# Altium PCB PCB1.PcbDoc (part 2 of 2)
Units mm, origin at the board's own origin, x right, y up, seen from the top; angles counter-clockwise.
Board outline 123 x 45 mm, 2 copper layers (Top Layer, Bottom Layer); 147 components, 132 nets, 546 pads, 235 vias.
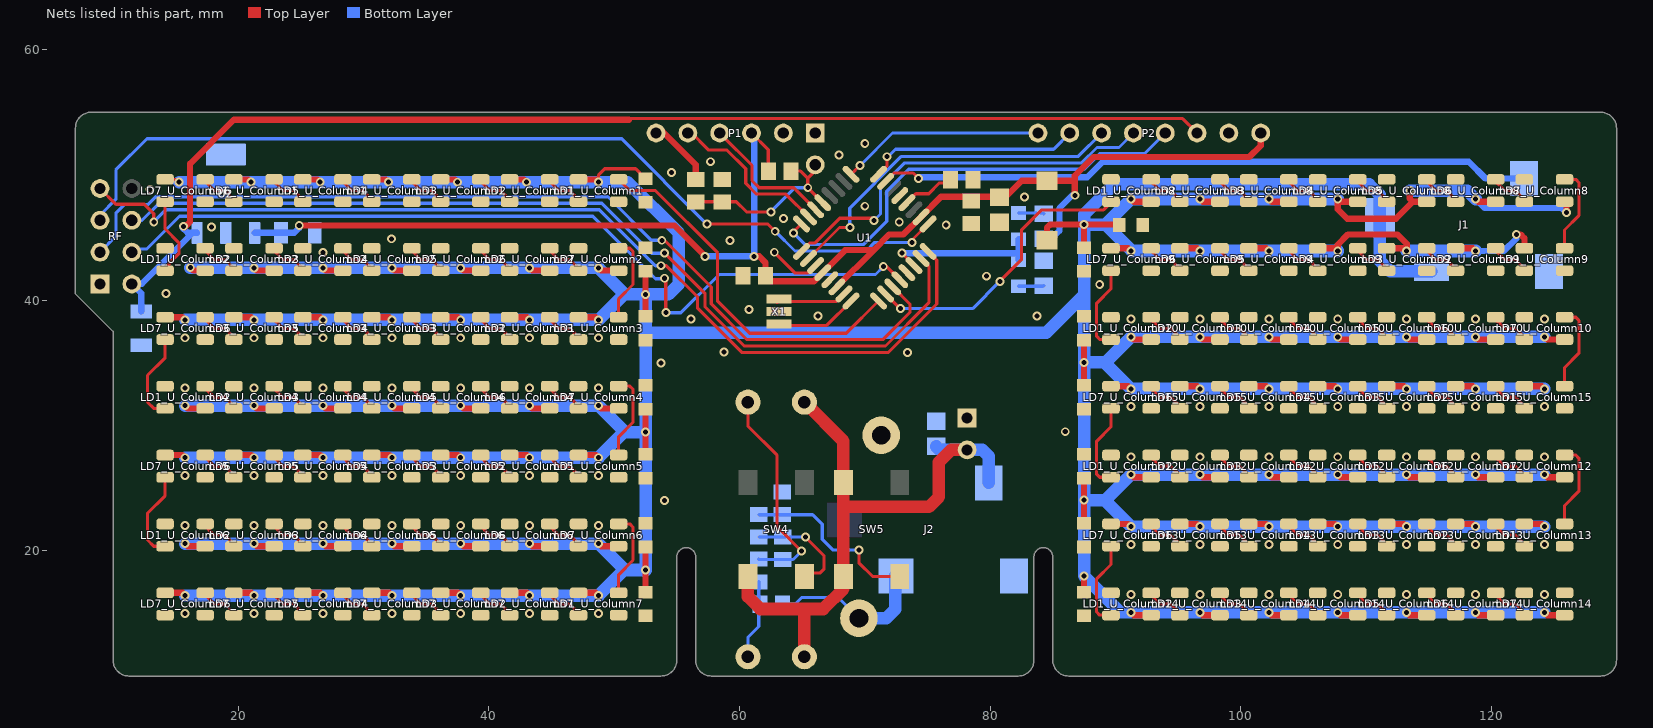
[diagram p2: the nets of this part, all layers, seen from the top]

## Via types
v1: diameter 0.711, hole 0.4, Top Layer to Bottom Layer, tented both sides, 231 vias
v2: diameter 1.702, hole 1.702, Top Layer to Bottom Layer, 4 vias

## Nets (pads, with @x,y where several pads share a name; then routed paths per layer and width w, separated by ;. In a path a pad name is that pad's centre, name@x,y a point inside that pad or via, vN(x,y) a via of type N, cw(c..) or ccw(c..) an arc to the next point about the centre after c; other vN are vias at no path point)
5V_LEDS: C7.2 C8.2 C9.2 C10.2 C11.2 C12.2 C13.2 C14.2 C15.2 C16.2 C17.2 C18.2 C19.2 C20.2 D4.1 J1.2 J1.4 LD1_U_Column1.1 LD1_U_Column2.1 LD1_U_Column3.1 LD1_U_Column4.1 LD1_U_Column5.1 LD1_U_Column6.1 LD1_U_Column7.1 LD1_U_Column8.1 LD1_U_Column9.1 LD1_U_Column10.1 LD1_U_Column12.1 LD1_U_Column13.1 LD1_U_Column14.1 LD1_U_Column15.1 LD2_U_Column1.1 LD2_U_Column2.1 LD2_U_Column3.1 LD2_U_Column4.1 LD2_U_Column5.1 LD2_U_Column6.1 LD2_U_Column7.1 LD2_U_Column8.1 LD2_U_Column9.1 LD2_U_Column10.1 LD2_U_Column12.1 LD2_U_Column13.1 LD2_U_Column14.1 LD2_U_Column15.1 LD3_U_Column1.1 LD3_U_Column2.1 LD3_U_Column3.1 LD3_U_Column4.1 LD3_U_Column5.1 LD3_U_Column6.1 LD3_U_Column7.1 LD3_U_Column8.1 LD3_U_Column9.1 LD3_U_Column10.1 LD3_U_Column12.1 LD3_U_Column13.1 LD3_U_Column14.1 LD3_U_Column15.1 LD4_U_Column1.1 LD4_U_Column2.1 LD4_U_Column3.1 LD4_U_Column4.1 LD4_U_Column5.1 LD4_U_Column6.1 LD4_U_Column7.1 LD4_U_Column8.1 LD4_U_Column9.1 LD4_U_Column10.1 LD4_U_Column12.1 LD4_U_Column13.1 LD4_U_Column14.1 LD4_U_Column15.1 LD5_U_Column1.1 LD5_U_Column2.1 LD5_U_Column3.1 LD5_U_Column4.1 LD5_U_Column5.1 LD5_U_Column6.1 LD5_U_Column7.1 LD5_U_Column8.1 LD5_U_Column9.1 LD5_U_Column10.1 LD5_U_Column12.1 LD5_U_Column13.1 LD5_U_Column14.1 LD5_U_Column15.1 LD6_U_Column1.1 LD6_U_Column2.1 LD6_U_Column3.1 LD6_U_Column4.1 LD6_U_Column5.1 LD6_U_Column6.1 LD6_U_Column7.1 LD6_U_Column8.1 LD6_U_Column9.1 LD6_U_Column10.1 LD6_U_Column12.1 LD6_U_Column13.1 LD6_U_Column14.1 LD6_U_Column15.1 LD7_U_Column1.1 LD7_U_Column2.1 LD7_U_Column3.1 LD7_U_Column4.1 LD7_U_Column5.1 LD7_U_Column6.1 LD7_U_Column7.1 LD7_U_Column8.1 LD7_U_Column9.1 LD7_U_Column10.1 LD7_U_Column12.1 LD7_U_Column13.1 LD7_U_Column14.1 LD7_U_Column15.1 | length 850.5
  Top Layer w0.254: LD7_U_Column1.1@14.15,49.64 15.11,49.64 15.276,49.474 v1(15.276,49.427) ; v1(48.75,49.424) 48.75,49.998 49.242,50.49 51.71,50.49 C7.2@52.5,49.7
  Top Layer w0.5: LD7_U_Column7.1@14.15,16.64 15.534,16.64 v1(15.75,16.424) ; LD7_U_Column5.1@14.15,27.64 15.534,27.64 v1(15.75,27.424) ; LD7_U_Column3.1@14.15,38.64 15.534,38.64 v1(15.75,38.424) ; v1(15.75,20.576) 15.966,20.36 LD1_U_Column6.1@17.35,20.36 ; v1(15.75,31.576) 15.966,31.36 LD1_U_Column4.1@17.35,31.36 ; v1(16.161,42.602) 16.161,42.621 16.422,42.36 LD1_U_Column2.1@17.35,42.36 ; LD6_U_Column7.1@19.65,16.64 21.034,16.64 v1(21.25,16.424) ; LD6_U_Column5.1@19.65,27.64 21.034,27.64 v1(21.25,27.424) ; LD6_U_Column3.1@19.65,38.64 21.034,38.64 v1(21.25,38.424) ; LD6_U_Column1.1@19.65,49.64 20.796,49.64 v1(21.012,49.424) ; v1(21.25,20.576) 21.466,20.36 LD2_U_Column6.1@22.85,20.36 ; v1(21.25,31.576) 21.466,31.36 LD2_U_Column4.1@22.85,31.36 ; v1(21.25,42.576) 21.466,42.36 LD2_U_Column2.1@22.85,42.36 ; LD5_U_Column7.1@25.15,16.64 26.534,16.64 v1(26.75,16.424) ; LD5_U_Column5.1@25.15,27.64 26.534,27.64 v1(26.75,27.424) ; LD5_U_Column3.1@25.15,38.64 26.534,38.64 v1(26.75,38.424) ; LD5_U_Column1.1@25.15,49.64 26.315,49.64 v1(26.534,49.421) ; v1(26.75,20.576) 26.966,20.36 LD3_U_Column6.1@28.35,20.36 ; v1(26.75,31.576) 26.966,31.36 LD3_U_Column4.1@28.35,31.36 ; v1(26.75,42.576) 26.966,42.36 LD3_U_Column2.1@28.35,42.36 ; LD4_U_Column7.1@30.65,16.64 32.034,16.64 v1(32.25,16.424) ; LD4_U_Column5.1@30.65,27.64 32.034,27.64 v1(32.25,27.424) ; LD4_U_Column3.1@30.65,38.64 32.034,38.64 v1(32.25,38.424) ; LD4_U_Column1.1@30.65,49.64 31.781,49.64 v1(32,49.421) ; v1(32.25,20.576) 32.466,20.36 LD4_U_Column6.1@33.85,20.36 ; v1(32.25,31.576) 32.466,31.36 LD4_U_Column4.1@33.85,31.36 ; v1(32.25,42.576) 32.466,42.36 LD4_U_Column2.1@33.85,42.36 ; LD3_U_Column7.1@36.15,16.64 37.534,16.64 v1(37.75,16.424) ; LD3_U_Column5.1@36.15,27.64 37.534,27.64 v1(37.75,27.424) ; LD3_U_Column3.1@36.15,38.64 37.534,38.64 v1(37.75,38.424) ; LD3_U_Column1.1@36.15,49.64 37.274,49.64 v1(37.5,49.414) ; v1(37.75,20.576) 37.966,20.36 LD5_U_Column6.1@39.35,20.36 ; v1(37.75,31.576) 37.966,31.36 LD5_U_Column4.1@39.35,31.36 ; v1(37.75,42.576) 37.966,42.36 LD5_U_Column2.1@39.35,42.36 ; LD2_U_Column7.1@41.65,16.64 43.034,16.64 v1(43.25,16.424) ; LD2_U_Column5.1@41.65,27.64 43.034,27.64 v1(43.25,27.424) ; LD2_U_Column3.1@41.65,38.64 43.034,38.64 v1(43.25,38.424) ; LD2_U_Column1.1@41.65,49.64 42.774,49.64 v1(43,49.414) ; v1(43.25,20.576) 43.466,20.36 LD6_U_Column6.1@44.85,20.36 ; v1(43.25,31.576) 43.466,31.36 LD6_U_Column4.1@44.85,31.36 ; v1(43.25,42.576) 43.466,42.36 LD6_U_Column2.1@44.85,42.36 ; LD1_U_Column7.1@47.15,16.64 48.534,16.64 v1(48.75,16.424) ; LD1_U_Column5.1@47.15,27.64 48.534,27.64 v1(48.75,27.424) ; LD1_U_Column3.1@47.15,38.64 48.534,38.64 v1(48.75,38.424) ; LD1_U_Column1.1@47.15,49.64 48.534,49.64 v1(48.75,49.424) ; v1(48.75,20.576) 48.966,20.36 LD7_U_Column6.1@50.35,20.36 ; v1(48.75,31.576) 48.966,31.36 LD7_U_Column4.1@50.35,31.36 ; v1(48.75,42.576) 48.966,42.36 LD7_U_Column2.1@50.35,42.36 ; C13.2@52.5,16.7 v1(52.5,18.463) C12.2@52.5,20.3 ; C11.2@52.5,27.7 v1(52.5,29.463) C10.2@52.5,31.3 ; C9.2@52.5,38.7 v1(52.5,40.463) C8.2@52.5,42.3 ; D4.1@84.54,44.775 84.54,45.79 84.787,46.037 v1(87.5,46.037) ; C20.2@87.5,16.7 v1(87.5,18) ; C19.2@87.5,22.2 v1(87.5,24.037) C18.2@87.5,25.8 ; C17.2@87.5,33.2 v1(87.5,35.037) C16.2@87.5,36.8 ; C15.2@87.5,44.2 v1(87.5,46.037) ; LD7_U_Column13.1@89.65,22.14 91.034,22.14 v1(91.25,21.924) ; LD7_U_Column15.1@89.65,33.14 91.034,33.14 v1(91.25,32.924) ; LD7_U_Column9.1@89.65,44.14 91.034,44.14 v1(91.25,43.924) ; C14.2@90.3,46 90.263,46.037 v1(87.5,46.037) ; v1(91.25,15.076) 91.466,14.86 LD1_U_Column14.1@92.85,14.86 ; v1(91.25,26.076) 91.466,25.86 LD1_U_Column12.1@92.85,25.86 ; v1(91.25,37.076) 91.466,36.86 LD1_U_Column10.1@92.85,36.86 ; v1(91.25,48.076) 91.466,47.86 LD1_U_Column8.1@92.85,47.86 ; LD6_U_Column13.1@95.15,22.14 96.534,22.14 v1(96.75,21.924) ; LD6_U_Column15.1@95.15,33.14 96.534,33.14 v1(96.75,32.924) ; LD6_U_Column9.1@95.15,44.14 96.534,44.14 v1(96.75,43.924) ; v1(96.75,15.076) 96.966,14.86 LD2_U_Column14.1@98.35,14.86 ; v1(96.75,26.076) 96.966,25.86 LD2_U_Column12.1@98.35,25.86 ; v1(96.75,37.076) 96.966,36.86 LD2_U_Column10.1@98.35,36.86 ; v1(96.75,48.076) 96.966,47.86 LD2_U_Column8.1@98.35,47.86 ; LD5_U_Column13.1@100.65,22.14 102.034,22.14 v1(102.25,21.924) ; LD5_U_Column15.1@100.65,33.14 102.034,33.14 v1(102.25,32.924) ; LD5_U_Column9.1@100.65,44.14 102.034,44.14 v1(102.25,43.924) ; v1(102.25,15.076) 102.466,14.86 LD3_U_Column14.1@103.85,14.86 ; v1(102.25,26.076) 102.466,25.86 LD3_U_Column12.1@103.85,25.86 ; v1(102.25,37.076) 102.466,36.86 LD3_U_Column10.1@103.85,36.86 ; v1(102.25,48.076) 102.466,47.86 LD3_U_Column8.1@103.85,47.86 ; LD4_U_Column13.1@106.15,22.14 107.534,22.14 v1(107.75,21.924) ; LD4_U_Column15.1@106.15,33.14 107.534,33.14 v1(107.75,32.924) ; LD4_U_Column9.1@106.15,44.14 107.534,44.14 v1(107.75,43.924) 107.75,44.434 108.566,45.25 112.5,45.25 113.25,44.5 v1(113.25,43.924) 113.034,44.14 LD3_U_Column9.1@111.65,44.14 ; v1(107.75,15.076) 107.966,14.86 LD4_U_Column14.1@109.35,14.86 ; v1(107.75,26.076) 107.966,25.86 LD4_U_Column12.1@109.35,25.86 ; v1(107.75,37.076) 107.966,36.86 LD4_U_Column10.1@109.35,36.86 ; LD4_U_Column8.1@109.35,47.86 107.966,47.86 v1(107.75,48.076) 107.75,47.25 108.5,46.5 112.39,46.5 113.75,47.86 ; LD3_U_Column13.1@111.65,22.14 113.034,22.14 v1(113.25,21.924) ; LD3_U_Column15.1@111.65,33.14 113.034,33.14 v1(113.25,32.924) ; v1(113.25,15.076) 113.466,14.86 LD5_U_Column14.1@114.85,14.86 ; v1(113.25,26.076) 113.466,25.86 LD5_U_Column12.1@114.85,25.86 ; v1(113.25,37.076) 113.466,36.86 LD5_U_Column10.1@114.85,36.86 ; v1(113.5,48.75) 113.5,48.11 113.75,47.86 ; LD5_U_Column8.1@114.85,47.86 113.75,47.86 ; LD2_U_Column13.1@117.15,22.14 118.534,22.14 v1(118.75,21.924) ; LD2_U_Column15.1@117.15,33.14 118.534,33.14 v1(118.75,32.924) ; LD2_U_Column9.1@117.15,44.14 118.534,44.14 v1(118.75,43.924) ; v1(118.75,15.076) 118.966,14.86 LD6_U_Column14.1@120.35,14.86 ; v1(118.75,26.076) 118.966,25.86 LD6_U_Column12.1@120.35,25.86 ; v1(118.75,37.076) 118.966,36.86 LD6_U_Column10.1@120.35,36.86 ; v1(118.75,48.076) 118.966,47.86 LD6_U_Column8.1@120.35,47.86 ; v1(122,45.25) 122.334,45.25 122.65,44.934 LD1_U_Column9.1@122.65,44.14 ; LD1_U_Column13.1@122.65,22.14 124.034,22.14 v1(124.25,21.924) ; LD1_U_Column15.1@122.65,33.14 124.034,33.14 v1(124.25,32.924) ; v1(124.25,15.076) 124.466,14.86 LD7_U_Column14.1@125.85,14.86 ; v1(124.25,26.076) 124.466,25.86 LD7_U_Column12.1@125.85,25.86 ; v1(124.25,37.076) 124.466,36.86 LD7_U_Column10.1@125.85,36.86 ; LD7_U_Column8.1@125.85,47.86 126,47.71 v1(126,47)
  Bottom Layer w0.5: v1(118.75,43.924) 121.015,43.924 122,44.909 v1(122,45.25) ; v1(118.75,48.076) 119.471,47.355 125.645,47.355 v1(126,47)
  Bottom Layer w1: v1(15.276,49.427) 21.247,49.427 v1@21.25,49.424 ; v1(15.75,16.424) v1(21.25,16.424) v1(26.75,16.424) v1(32.25,16.424) v1(37.75,16.424) v1(43.25,16.424) v1(48.75,16.424) 50.789,18.463 ; v1(15.75,20.576) v1(21.25,20.576) v1(26.75,20.576) v1(32.25,20.576) v1(37.75,20.576) v1(43.25,20.576) v1(48.75,20.576) 50.863,18.463 v1(52.5,18.463) v1(52.5,29.463) ; v1(15.75,27.424) v1(21.25,27.424) v1(26.75,27.424) v1(32.25,27.424) v1(37.75,27.424) v1(43.25,27.424) v1(48.75,27.424) 50.789,29.463 ; v1(15.75,31.576) v1(21.25,31.576) v1(26.75,31.576) v1(32.25,31.576) v1(37.75,31.576) v1(43.25,31.576) v1(48.75,31.576) 50.863,29.463 v1(52.5,29.463) ; v1(15.75,38.424) v1(21.25,38.424) v1(26.75,38.424) v1(32.25,38.424) v1(37.75,38.424) v1(43.25,38.424) v1(48.75,38.424) 50.789,40.463 50.863,40.463 ; v1(16.161,42.602) 21.224,42.602 v1(21.25,42.576) v1(26.75,42.576) v1(32.25,42.576) v1(37.75,42.576) v1(43.25,42.576) v1(48.75,42.576) 50.863,40.463 ; v1(21.012,49.424) v1@21.25,49.424 ; v1(26.534,49.421) v1@26.747,49.421 ; v1(37.5,49.414) v1@37.733,49.414 ; 89.211,24.037 v1(91.25,26.076) v1(96.75,26.076) v1(102.25,26.076) v1(107.75,26.076) v1(113.25,26.076) v1(118.75,26.076) v1(124.25,26.076) ; 89.211,35.037 v1(91.25,37.076) v1(96.75,37.076) v1(102.25,37.076) v1(107.75,37.076) v1(113.25,37.076) v1(118.75,37.076) v1(124.25,37.076) ; v1(107.75,43.924) v1(102.25,43.924) v1(96.75,43.924) 91.326,43.924 89.213,46.037 89.211,46.037 ; v1(107.75,48.076) v1(102.25,48.076) v1(96.75,48.076) v1(91.25,48.076) 89.211,46.037 ; v1(113.25,43.924) v1(118.75,43.924) ; v1(113.5,48.75) 118.076,48.75 v1(118.75,48.076) ; J1.2@115.22,42.292 111.958,42.292 111.105,43.145 J1.4@111.105,46.762 111.105,48.395 110.25,49.25 89.896,49.25 87.5,46.854 v1(87.5,46.037) ; v1(124.25,15.076) v1(118.75,15.076) v1(113.25,15.076) v1(107.75,15.076) v1(102.25,15.076) v1(96.75,15.076) v1(91.25,15.076) 90.424,15.076 v1(87.5,18) v1(87.5,24.037) ; v1(124.25,21.924) v1(118.75,21.924) v1(113.25,21.924) v1(107.75,21.924) v1(102.25,21.924) v1(96.75,21.924) v1(91.25,21.924) 89.137,24.037 v1(87.5,24.037) ; v1(124.25,32.924) v1(118.75,32.924) v1(113.25,32.924) v1(107.75,32.924) v1(102.25,32.924) v1(96.75,32.924) v1(91.25,32.924) 89.137,35.037 v1(87.5,35.037) ; v1@21.25,49.424 26.75,49.424 v1@26.747,49.421 ; v1@26.747,49.421 v1(32,49.421) v1@37.74,49.421 ; v1@37.733,49.414 v1(43,49.414) 43.01,49.424 v1(48.75,49.424) 51.076,49.424 55.153,45.347 55.153,41.289 54.328,40.463 v1(52.5,40.463) ; v1@37.733,49.414 v1@37.74,49.421 ; v1@37.74,49.421 37.747,49.421 37.743,49.424 v1@37.74,49.421 ; 50.863,40.463 v1(52.5,40.463) ; v1(52.5,29.463) 52.5,37.5 ; 52.5,37.5 52.61,37.39 84.464,37.39 87.5,40.426 ; 52.5,37.5 v1(52.5,40.463) ; v1(87.5,24.037) v1(87.5,35.037) ; v1(87.5,35.037) 87.5,40.426 ; 87.5,40.426 v1(87.5,46.037) ; v1(87.5,46.037) 89.211,46.037
+3.3: C22.2 P2.3 RF.2 U2.3 | length 98.3
  Top Layer w0.254: 51.175,54.396 51.275,54.496 95.364,54.496 P2.3@96.52,53.34
  Top Layer w0.5: v1(15.621,45.898) 15.621,45.854 15.675,45.8 16.145,46.27 16.145,50.895 19.646,54.396 51.175,54.396
  Bottom Layer w0.5: C22.2@12.25,39.1 12.25,40.544 RF.2@11.5,41.294 12.294,41.294 U2.3@16.375,45.375 ; v1(15.621,45.898) 15.621,45.856 15.545,45.78 15.95,45.375 U2.3@16.375,45.375 ; U2.3@16.7,45.375 U2.3@16.375,45.375
+5: C1.1 C3.1 C4.1 C21.2 D4.2 P1.3 P2.1@101.6,53.34 R1.2 R2.1 U1.4 U1.6 U1.18 U2.1 | length 113.2
  Top Layer w0.254: P1.3@60.96,53.34 62.3,52 R1.2@62.3,50.3
  Top Layer w0.5: v1(24.86,45.968) 54.782,45.968 v1(57.25,43.5) ; v1(61.17,43.5) 61.58,43.5 62.07,43.01 C4.1@62.07,42 ; C4.1@62.07,41.75 C4.1@62.07,42 ; U1.6@67.773,41.066 70.707,44 ; v1(86.765,48.374) 86.765,49.525 ; P2.1@101.6,53.34 101.6,52.332 100.703,51.435 88.261,51.435 86.765,49.94 86.765,49.525 ; C4.1@62.07,42 62.57,41.5 65.944,41.5 U1.4@66.641,42.197 68.444,44 70.707,44 ; 70.707,44 71.957,45.25 73.088,45.25 U1.18@74.49,46.652 76.084,48.246 80.75,48.246 81.246,48.246 82.525,49.525 D4.2@84.54,49.525 86.765,49.525
  Bottom Layer w0.5: U2.1@21.3,45.375 C21.2@23.4,45.375 24.467,45.375 24.86,45.769 v1(24.86,45.968) ; v1(57.25,43.5) v1(61.17,43.5) P1.3@61.17,53.75 ; R2.1@84.278,44.904 84.9,44.904 85.532,45.536 85.532,47.338 86.568,48.374 v1(86.765,48.374)
A1: P2.7 U1.24 | length 17
  Top Layer w0.254: U1.24@71.096,50.046 71.782,50.732 v1(71.782,51.45)
  Bottom Layer w0.254: v1(71.782,51.45) 71.85,51.45 72.45,52.05 85.07,52.05 P2.7@86.36,53.34
A2: P2.8 U1.25 | length 16.3
  Top Layer w0.254: U1.25@68.904,50.046 69.608,50.75 v1(69.625,50.75)
  Bottom Layer w0.254: v1(69.625,50.75) 72.215,53.34 P2.8@83.82,53.34
A_Btn: J1.3 U1.23 | length 52.5
  Top Layer w0.254: U1.23@71.662,49.48 72.332,50.15 73.853,50.15 v1(74.295,49.708)
  Bottom Layer w0.5: v1(74.295,49.708) 74.392,49.806 87.76,49.806 89.004,51.05 118.2,51.05 119.542,49.708 J1.3@122.611,49.708
BAT+: 1.2 BAT+.1 J2.2 | length 12.9
  Bottom Layer w0.254: 1.2@63.434,15.746 64.439,15.746 64.958,16.265 67.879,16.265 BAT+.1@69.53,14.614
  Bottom Layer w1: BAT+.1@69.53,14.614 71.715,14.614 72.426,15.324 J2.2@72.426,17.991
D2: P2.4 U1.32 | length 36.1
  Top Layer w0.254: v1(64.3,45.375) 64.3,45.442 U1.32@64.944,46.086
  Bottom Layer w0.254: v1(64.3,45.375) 65.243,44.432 69.886,44.432 71.758,46.304 71.758,48.707 73.496,50.445 87.507,50.445 88.743,51.681 88.996,51.681 92.321,51.681 P2.4@93.98,53.34
D3: P2.5 U1.1 | length 31.8
  Top Layer w0.254: U1.1@64.944,43.894 65.625,44.575 66.038,44.575 68,46.537 70.538,46.537 v1(70.725,46.35)
  Bottom Layer w0.254: v1(70.725,46.35) 71.25,46.875 71.25,49.025 73.178,50.953 87.297,50.953 88.533,52.189 90.289,52.189 P2.5@91.44,53.34
D4: P2.6 U1.2 | length 28.5
  Top Layer w0.254: U1.2@65.51,43.328 67.982,45.8 v1(68.804,45.8)
  Bottom Layer w0.254: v1(68.804,45.8) 68.804,47.346 68.8,47.35 72.925,51.475 87.035,51.475 P2.6@88.9,53.34
DO1: LD1_U_Column1.4 U1.9 | length 29.2
  Top Layer w0.254: LD1_U_Column1.4@50.35,49.64 51.24,48.75 53.275,48.75 58.25,43.775 58.25,39.914 60.805,37.36 68.521,37.36 U1.9@71.096,39.934
DO2: LD1_U_Column8.4 U1.10 | length 23.4
  Top Layer w0.254: U1.10@71.662,40.5 72.837,39.325 v1(72.865,39.325) ; v1(80.78,41.5) 82.5,43.22 82.5,45.589 84.119,47.208 89.058,47.208 LD1_U_Column8.4@89.65,47.8
  Bottom Layer w0.254: v1(72.865,39.325) 78.605,39.325 v1(80.78,41.5)
GND: 5.1 8.2 BAT-.1 C1.2 C2.1 C3.2 C4.2 C5.2 C7.1 C8.1 C9.1 C10.1 C11.1 C12.1 C13.1 C14.1 C15.1 C16.1 C17.1 C18.1 C19.1 C20.1 C21.1 C22.1 J1.1 J2.1 LD1_U_Column1.3 LD1_U_Column2.3 LD1_U_Column3.3 LD1_U_Column4.3 LD1_U_Column5.3 LD1_U_Column6.3 LD1_U_Column7.3 LD1_U_Column8.3 LD1_U_Column9.3 LD1_U_Column10.3 LD1_U_Column12.3 LD1_U_Column13.3 LD1_U_Column14.3 LD1_U_Column15.3 LD2_U_Column1.3 LD2_U_Column2.3 LD2_U_Column3.3 LD2_U_Column4.3 LD2_U_Column5.3 LD2_U_Column6.3 LD2_U_Column7.3 LD2_U_Column8.3 LD2_U_Column9.3 LD2_U_Column10.3 LD2_U_Column12.3 LD2_U_Column13.3 LD2_U_Column14.3 LD2_U_Column15.3 LD3_U_Column1.3 LD3_U_Column2.3 LD3_U_Column3.3 LD3_U_Column4.3 LD3_U_Column5.3 LD3_U_Column6.3 LD3_U_Column7.3 LD3_U_Column8.3 LD3_U_Column9.3 LD3_U_Column10.3 LD3_U_Column12.3 LD3_U_Column13.3 LD3_U_Column14.3 LD3_U_Column15.3 LD4_U_Column1.3 LD4_U_Column2.3 LD4_U_Column3.3 LD4_U_Column4.3 LD4_U_Column5.3 LD4_U_Column6.3 LD4_U_Column7.3 LD4_U_Column8.3 LD4_U_Column9.3 LD4_U_Column10.3 LD4_U_Column12.3 LD4_U_Column13.3 LD4_U_Column14.3 LD4_U_Column15.3 LD5_U_Column1.3 LD5_U_Column2.3 LD5_U_Column3.3 LD5_U_Column4.3 LD5_U_Column5.3 LD5_U_Column6.3 LD5_U_Column7.3 LD5_U_Column8.3 LD5_U_Column9.3 LD5_U_Column10.3 LD5_U_Column12.3 LD5_U_Column13.3 LD5_U_Column14.3 LD5_U_Column15.3 LD6_U_Column1.3 LD6_U_Column2.3 LD6_U_Column3.3 LD6_U_Column4.3 LD6_U_Column5.3 LD6_U_Column6.3 LD6_U_Column7.3 LD6_U_Column8.3 LD6_U_Column9.3 LD6_U_Column10.3 LD6_U_Column12.3 LD6_U_Column13.3 LD6_U_Column14.3 LD6_U_Column15.3 LD7_U_Column1.3 LD7_U_Column2.3 LD7_U_Column3.3 LD7_U_Column4.3 LD7_U_Column5.3 LD7_U_Column6.3 LD7_U_Column7.3 LD7_U_Column8.3 LD7_U_Column9.3 LD7_U_Column10.3 LD7_U_Column12.3 LD7_U_Column13.3 LD7_U_Column14.3 LD7_U_Column15.3 P1.1 P1.2 P2.1@78.166,30.59 P2.2@99.06,53.34 R3.2 RF.1 U1.3 U1.5 U1.21 U2.2 U2.4 X1.GND | length 4.2
  Top Layer w0.254: v1(62.775,43.825) 64.436,42.164 65.477,42.164 U1.3@66.076,42.763
  other v1: 15.75,15 21.25,15 26.75,15 32.25,15 37.75,15 43.25,15 48.75,15 91.25,16.5 96.75,16.5 102.25,16.5 107.75,16.5 113.25,16.5 118.75,16.5 124.25,16.5 91.25,20.5 96.75,20.5 102.25,20.5 107.75,20.5 113.25,20.5 118.75,20.5 124.25,20.5 15.75,22 21.25,22 26.75,22 32.25,22 37.75,22 43.25,22 48.75,22 54,24 15.75,26 21.25,26 26.75,26 32.25,26 37.75,26 43.25,26 48.75,26 91.25,27.5 96.75,27.5 102.25,27.5 107.75,27.5 113.25,27.5 118.75,27.5 124.25,27.5 86,29.5 91.25,31.5 96.75,31.5 102.25,31.5 107.75,31.5 113.25,31.5 118.75,31.5 124.25,31.5 15.75,33 21.25,33 26.75,33 32.25,33 37.75,33 43.25,33 48.75,33 53.75,35 73.406,35.814 58.776,35.865 15.75,37 21.25,37 26.75,37 32.25,37 37.75,37 43.25,37 48.75,37 56.125,38.5 91.25,38.5 96.75,38.5 102.25,38.5 107.75,38.5 113.25,38.5 118.75,38.5 124.25,38.5 66.25,38.75 83.75,38.75 60.75,39.25 14.224,40.537 88.75,41.25 79.718,41.91 26.75,43.81 59.25,44.75 32.236,44.9 17.856,45.847 76.5,46 72.75,46.25 63.5,46.525 70,47.5 82.75,48.25 12.954,48.85 54.575,50.2 57.7,51.05 67.945,51.583 70,52.5
Indicator: D1.2 D2.1 U1.14 | length 12.3
  Top Layer w0.254: v1(72.982,43.75) U1.14@73.924,42.763
  Bottom Layer w0.5: v1(72.982,43.75) 82.213,43.75 82.278,43.815 ; D2.1@82.278,43.204 82.278,43.815 ; D1.2@82.278,44.854 82.278,43.815
Net1_1: 1.1 2.2 SW1.0 | length 6.4
  Bottom Layer w0.254: SW1.0@60.676,11.54 60.676,13.1 61.529,13.953 2.2@61.529,17.524 2.2@61.551,17.546
Net2_1: 2.1 3.2 SW3.1 | length 17.4
  Top Layer w0.254: SW3.1@60.676,31.86 60.676,29.931 63,27.607 63,21.91 v1(64.944,19.965)
  Bottom Layer w0.254: 2.1@61.529,19.324 61.551,19.302 3.2@63.434,19.302 64.281,19.302 v1(64.944,19.965)
Net3_1: 3.1 4.2 SW4.2 | length 8.1
  Top Layer w0.254: v1(65.266,21.091) 66.736,19.621 66.736,18.525 66.441,18.23 SW4.2@65.684,18.23
  Bottom Layer w0.254: 4.2@61.551,21.102 3.1@63.434,21.102 63.445,21.091 v1(65.266,21.091)
Net4_1: 4.1 5.2 SW5.2 | length 14.6
  Top Layer w0.254: v1(69.53,20.049) 69.53,19.033 70.613,17.95 SW5.2@72.796,17.95
  Bottom Layer w0.254: 4.1@61.551,22.902 61.573,22.88 5.2@63.412,22.88 65.836,22.88 66.607,22.109 66.607,20.916 67.474,20.049 v1(69.53,20.049)
NetC5_1: C5.1 U1.20 | length 4
  Top Layer w0.254: U1.20@73.359,47.783 74.076,48.5 75.1,48.5 75.95,49.35 C5.1@76.75,49.35
NetC6_2: C6.2 P1.6 | length 5.3
  Top Layer w0.5: P1.6@53.55,53.75 56.5,50.8 C6.2@56.5,49.65
NetD1_1: D1.1 R2.2 | length 2
  Bottom Layer w0.254: D1.1@82.278,46.954 84.228,46.954 R2.2@84.278,46.904
NetD2_2: D2.2 R3.1 | length 2
  Bottom Layer w0.254: D2.2@82.278,41.104 84.228,41.104 R3.1@84.278,41.154
NetLabel13: U1.13
NetLD1_U_Column1_2: LD1_U_Column1.2 LD2_U_Column1.4 | length 3.4
  Top Layer w0.254: LD2_U_Column1.4@44.675,49.64 45.565,48.75 46.435,48.75 LD1_U_Column1.2@47.325,47.86
NetLD1_U_Column2_2: LD1_U_Column2.2 LD2_U_Column2.4 | length 3.4
  Top Layer w0.254: LD1_U_Column2.2@17.175,44.14 18.065,43.25 18.935,43.25 LD2_U_Column2.4@19.825,42.36
NetLD1_U_Column2_4: LD1_U_Column2.4 LD7_U_Column1.2 | length 6.4
  Top Layer w0.254: LD1_U_Column2.4@14.15,42.36 14.15,42.602 14.882,43.334 ; LD7_U_Column1.2@14.15,47.86 14.15,45.679 15.25,44.579 15.25,43.701 14.883,43.334
NetLD1_U_Column3_2: LD1_U_Column3.2 LD2_U_Column3.4 | length 3.4
  Top Layer w0.254: LD2_U_Column3.4@44.675,38.64 45.565,37.75 46.435,37.75 LD1_U_Column3.2@47.325,36.86
NetLD1_U_Column3_4: LD1_U_Column3.4 LD7_U_Column2.2 | length 7
  Top Layer w0.254: LD1_U_Column3.4@50.35,38.64 50.35,40.1 51.5,41.25 51.5,43.89 51.25,44.14 LD7_U_Column2.2@50.35,44.14
NetLD1_U_Column4_2: LD1_U_Column4.2 LD2_U_Column4.4 | length 3.4
  Top Layer w0.254: LD1_U_Column4.2@17.175,33.14 18.065,32.25 18.935,32.25 LD2_U_Column4.4@19.825,31.36
NetLD1_U_Column4_4: LD1_U_Column4.4 LD7_U_Column3.2 | length 7.2
  Top Layer w0.254: LD1_U_Column4.4@14.15,31.36 13.25,31.36 12.75,31.86 12.75,34 14.15,35.4 LD7_U_Column3.2@14.15,36.86
NetLD1_U_Column5_2: LD1_U_Column5.2 LD2_U_Column5.4 | length 3.4
  Top Layer w0.254: LD2_U_Column5.4@44.675,27.64 45.565,26.75 46.435,26.75 LD1_U_Column5.2@47.325,25.86
NetLD1_U_Column5_4: LD1_U_Column5.4 LD7_U_Column4.2 | length 7
  Top Layer w0.254: LD1_U_Column5.4@50.35,27.64 50.35,29.1 51.5,30.25 51.5,32.89 51.25,33.14 LD7_U_Column4.2@50.35,33.14
NetLD1_U_Column6_2: LD1_U_Column6.2 LD2_U_Column6.4 | length 3.4
  Top Layer w0.254: LD1_U_Column6.2@17.175,22.14 18.065,21.25 18.935,21.25 LD2_U_Column6.4@19.825,20.36
NetLD1_U_Column6_4: LD1_U_Column6.4 LD7_U_Column5.2 | length 7.2
  Top Layer w0.254: LD1_U_Column6.4@14.15,20.36 13.25,20.36 12.75,20.86 12.75,23 14.15,24.4 LD7_U_Column5.2@14.15,25.86
NetLD1_U_Column7_2: LD1_U_Column7.2 LD2_U_Column7.4 | length 3.4
  Top Layer w0.254: LD2_U_Column7.4@44.675,16.64 45.565,15.75 46.435,15.75 LD1_U_Column7.2@47.325,14.86
NetLD1_U_Column7_4: LD1_U_Column7.4 LD7_U_Column6.2 | length 7
  Top Layer w0.254: LD1_U_Column7.4@50.35,16.64 50.35,18.1 51.5,19.25 51.5,21.89 51.25,22.14 LD7_U_Column6.2@50.35,22.14
NetLD1_U_Column8_2: LD1_U_Column8.2 LD2_U_Column8.4 | length 3.4
  Top Layer w0.254: LD1_U_Column8.2@92.675,49.64 93.565,48.75 94.435,48.75 LD2_U_Column8.4@95.325,47.86
NetLD1_U_Column9_2: LD1_U_Column9.2 LD2_U_Column9.4 | length 3.4
  Top Layer w0.254: LD2_U_Column9.4@120.175,44.14 121.065,43.25 121.935,43.25 LD1_U_Column9.2@122.825,42.36
NetLD1_U_Column9_4: LD1_U_Column9.4 LD7_U_Column8.2 | length 7
  Top Layer w0.254: LD1_U_Column9.4@125.85,44.14 125.85,45.6 127,46.75 127,49.39 126.75,49.64 LD7_U_Column8.2@125.85,49.64
NetLD1_U_Column10_2: LD1_U_Column10.2 LD2_U_Column10.4 | length 3.4
  Top Layer w0.254: LD1_U_Column10.2@92.675,38.64 93.565,37.75 94.435,37.75 LD2_U_Column10.4@95.325,36.86
NetLD1_U_Column10_4: LD1_U_Column10.4 LD7_U_Column9.2 | length 7
  Top Layer w0.254: LD1_U_Column10.4@89.65,36.86 88.75,36.86 88.5,37.11 88.5,39.75 89.65,40.9 LD7_U_Column9.2@89.65,42.36
NetLD1_U_Column12_2: LD1_U_Column12.2 LD2_U_Column12.4 | length 3.4
  Top Layer w0.254: LD1_U_Column12.2@92.675,27.64 93.565,26.75 94.435,26.75 LD2_U_Column12.4@95.325,25.86
NetLD1_U_Column12_4: LD1_U_Column12.4 LD7_U_Column15.2 | length 7
  Top Layer w0.254: LD1_U_Column12.4@89.65,25.86 88.75,25.86 88.5,26.11 88.5,28.75 89.65,29.9 LD7_U_Column15.2@89.65,31.36
NetLD1_U_Column13_2: LD1_U_Column13.2 LD2_U_Column13.4 | length 3.4
  Top Layer w0.254: LD2_U_Column13.4@120.175,22.14 121.065,21.25 121.935,21.25 LD1_U_Column13.2@122.825,20.36
NetLD1_U_Column13_4: LD1_U_Column13.4 LD7_U_Column12.2 | length 7
  Top Layer w0.254: LD1_U_Column13.4@125.85,22.14 125.85,23.6 127,24.75 127,27.39 126.75,27.64 LD7_U_Column12.2@125.85,27.64
NetLD1_U_Column14_2: LD1_U_Column14.2 LD2_U_Column14.4 | length 3.4
  Top Layer w0.254: LD1_U_Column14.2@92.675,16.64 93.565,15.75 94.435,15.75 LD2_U_Column14.4@95.325,14.86
NetLD1_U_Column14_4: LD1_U_Column14.4 LD7_U_Column13.2 | length 7
  Top Layer w0.254: LD1_U_Column14.4@89.65,14.86 88.75,14.86 88.5,15.11 88.5,17.75 89.65,18.9 LD7_U_Column13.2@89.65,20.36
NetLD1_U_Column15_2: LD1_U_Column15.2 LD2_U_Column15.4 | length 3.4
  Top Layer w0.254: LD2_U_Column15.4@120.175,33.14 121.065,32.25 121.935,32.25 LD1_U_Column15.2@122.825,31.36
NetLD1_U_Column15_4: LD1_U_Column15.4 LD7_U_Column10.2 | length 7
  Top Layer w0.254: LD1_U_Column15.4@125.85,33.14 125.85,34.6 127,35.75 127,38.39 126.75,38.64 LD7_U_Column10.2@125.85,38.64
NetLD2_U_Column1_2: LD2_U_Column1.2 LD3_U_Column1.4 | length 3.4
  Top Layer w0.254: LD3_U_Column1.4@39.175,49.64 40.065,48.75 40.935,48.75 LD2_U_Column1.2@41.825,47.86
NetLD2_U_Column2_2: LD2_U_Column2.2 LD3_U_Column2.4 | length 3.4
  Top Layer w0.254: LD2_U_Column2.2@22.675,44.14 23.565,43.25 24.435,43.25 LD3_U_Column2.4@25.325,42.36
NetLD2_U_Column3_2: LD2_U_Column3.2 LD3_U_Column3.4 | length 3.4
  Top Layer w0.254: LD3_U_Column3.4@39.175,38.64 40.065,37.75 40.935,37.75 LD2_U_Column3.2@41.825,36.86
NetLD2_U_Column4_2: LD2_U_Column4.2 LD3_U_Column4.4 | length 3.4
  Top Layer w0.254: LD2_U_Column4.2@22.675,33.14 23.565,32.25 24.435,32.25 LD3_U_Column4.4@25.325,31.36
NetLD2_U_Column5_2: LD2_U_Column5.2 LD3_U_Column5.4 | length 3.4
  Top Layer w0.254: LD3_U_Column5.4@39.175,27.64 40.065,26.75 40.935,26.75 LD2_U_Column5.2@41.825,25.86
NetLD2_U_Column6_2: LD2_U_Column6.2 LD3_U_Column6.4 | length 3.4
  Top Layer w0.254: LD2_U_Column6.2@22.675,22.14 23.565,21.25 24.435,21.25 LD3_U_Column6.4@25.325,20.36
NetLD2_U_Column7_2: LD2_U_Column7.2 LD3_U_Column7.4 | length 3.4
  Top Layer w0.254: LD3_U_Column7.4@39.175,16.64 40.065,15.75 40.935,15.75 LD2_U_Column7.2@41.825,14.86
NetLD2_U_Column8_2: LD2_U_Column8.2 LD3_U_Column8.4 | length 3.4
  Top Layer w0.254: LD2_U_Column8.2@98.175,49.64 99.065,48.75 99.935,48.75 LD3_U_Column8.4@100.825,47.86
NetLD2_U_Column9_2: LD2_U_Column9.2 LD3_U_Column9.4 | length 3.4
  Top Layer w0.254: LD3_U_Column9.4@114.675,44.14 115.565,43.25 116.435,43.25 LD2_U_Column9.2@117.325,42.36
NetLD2_U_Column10_2: LD2_U_Column10.2 LD3_U_Column10.4 | length 3.4
  Top Layer w0.254: LD2_U_Column10.2@98.175,38.64 99.065,37.75 99.935,37.75 LD3_U_Column10.4@100.825,36.86
NetLD2_U_Column12_2: LD2_U_Column12.2 LD3_U_Column12.4 | length 3.4
  Top Layer w0.254: LD2_U_Column12.2@98.175,27.64 99.065,26.75 99.935,26.75 LD3_U_Column12.4@100.825,25.86
NetLD2_U_Column13_2: LD2_U_Column13.2 LD3_U_Column13.4 | length 3.4
  Top Layer w0.254: LD3_U_Column13.4@114.675,22.14 115.565,21.25 116.435,21.25 LD2_U_Column13.2@117.325,20.36
NetLD2_U_Column14_2: LD2_U_Column14.2 LD3_U_Column14.4 | length 3.4
  Top Layer w0.254: LD2_U_Column14.2@98.175,16.64 99.065,15.75 99.935,15.75 LD3_U_Column14.4@100.825,14.86
NetLD2_U_Column15_2: LD2_U_Column15.2 LD3_U_Column15.4 | length 3.4
  Top Layer w0.254: LD3_U_Column15.4@114.675,33.14 115.565,32.25 116.435,32.25 LD2_U_Column15.2@117.325,31.36
NetLD3_U_Column1_2: LD3_U_Column1.2 LD4_U_Column1.4 | length 3.4
  Top Layer w0.254: LD4_U_Column1.4@33.675,49.64 34.565,48.75 35.435,48.75 LD3_U_Column1.2@36.325,47.86
NetLD3_U_Column2_2: LD3_U_Column2.2 LD4_U_Column2.4 | length 3.4
  Top Layer w0.254: LD3_U_Column2.2@28.175,44.14 29.065,43.25 29.935,43.25 LD4_U_Column2.4@30.825,42.36
NetLD3_U_Column3_2: LD3_U_Column3.2 LD4_U_Column3.4 | length 3.4
  Top Layer w0.254: LD4_U_Column3.4@33.675,38.64 34.565,37.75 35.435,37.75 LD3_U_Column3.2@36.325,36.86
NetLD3_U_Column4_2: LD3_U_Column4.2 LD4_U_Column4.4 | length 3.4
  Top Layer w0.254: LD3_U_Column4.2@28.175,33.14 29.065,32.25 29.935,32.25 LD4_U_Column4.4@30.825,31.36
NetLD3_U_Column5_2: LD3_U_Column5.2 LD4_U_Column5.4 | length 3.4
  Top Layer w0.254: LD4_U_Column5.4@33.675,27.64 34.565,26.75 35.435,26.75 LD3_U_Column5.2@36.325,25.86
NetLD3_U_Column6_2: LD3_U_Column6.2 LD4_U_Column6.4 | length 3.4
  Top Layer w0.254: LD3_U_Column6.2@28.175,22.14 29.065,21.25 29.935,21.25 LD4_U_Column6.4@30.825,20.36
NetLD3_U_Column7_2: LD3_U_Column7.2 LD4_U_Column7.4 | length 3.4
  Top Layer w0.254: LD4_U_Column7.4@33.675,16.64 34.565,15.75 35.435,15.75 LD3_U_Column7.2@36.325,14.86
NetLD3_U_Column8_2: LD3_U_Column8.2 LD4_U_Column8.4 | length 3.4
  Top Layer w0.254: LD3_U_Column8.2@103.675,49.64 104.565,48.75 105.435,48.75 LD4_U_Column8.4@106.325,47.86
NetLD3_U_Column9_2: LD3_U_Column9.2 LD4_U_Column9.4 | length 3.4
  Top Layer w0.254: LD4_U_Column9.4@109.175,44.14 110.065,43.25 110.935,43.25 LD3_U_Column9.2@111.825,42.36
NetLD3_U_Column10_2: LD3_U_Column10.2 LD4_U_Column10.4 | length 3.4
  Top Layer w0.254: LD3_U_Column10.2@103.675,38.64 104.565,37.75 105.435,37.75 LD4_U_Column10.4@106.325,36.86
NetLD3_U_Column12_2: LD3_U_Column12.2 LD4_U_Column12.4 | length 3.4
  Top Layer w0.254: LD3_U_Column12.2@103.675,27.64 104.565,26.75 105.435,26.75 LD4_U_Column12.4@106.325,25.86
NetLD3_U_Column13_2: LD3_U_Column13.2 LD4_U_Column13.4 | length 3.4
  Top Layer w0.254: LD4_U_Column13.4@109.175,22.14 110.065,21.25 110.935,21.25 LD3_U_Column13.2@111.825,20.36
NetLD3_U_Column14_2: LD3_U_Column14.2 LD4_U_Column14.4 | length 3.4
  Top Layer w0.254: LD3_U_Column14.2@103.675,16.64 104.565,15.75 105.435,15.75 LD4_U_Column14.4@106.325,14.86
NetLD3_U_Column15_2: LD3_U_Column15.2 LD4_U_Column15.4 | length 3.4
  Top Layer w0.254: LD4_U_Column15.4@109.175,33.14 110.065,32.25 110.935,32.25 LD3_U_Column15.2@111.825,31.36
NetLD4_U_Column1_2: LD4_U_Column1.2 LD5_U_Column1.4 | length 3.4
  Top Layer w0.254: LD5_U_Column1.4@28.175,49.64 29.065,48.75 29.935,48.75 LD4_U_Column1.2@30.825,47.86
NetLD4_U_Column2_2: LD4_U_Column2.2 LD5_U_Column2.4 | length 3.4
  Top Layer w0.254: LD4_U_Column2.2@33.675,44.14 34.565,43.25 35.435,43.25 LD5_U_Column2.4@36.325,42.36
NetLD4_U_Column3_2: LD4_U_Column3.2 LD5_U_Column3.4 | length 3.4
  Top Layer w0.254: LD5_U_Column3.4@28.175,38.64 29.065,37.75 29.935,37.75 LD4_U_Column3.2@30.825,36.86
NetLD4_U_Column4_2: LD4_U_Column4.2 LD5_U_Column4.4 | length 3.4
  Top Layer w0.254: LD4_U_Column4.2@33.675,33.14 34.565,32.25 35.435,32.25 LD5_U_Column4.4@36.325,31.36
NetLD4_U_Column5_2: LD4_U_Column5.2 LD5_U_Column5.4 | length 3.4
  Top Layer w0.254: LD5_U_Column5.4@28.175,27.64 29.065,26.75 29.935,26.75 LD4_U_Column5.2@30.825,25.86
NetLD4_U_Column6_2: LD4_U_Column6.2 LD5_U_Column6.4 | length 3.4
  Top Layer w0.254: LD4_U_Column6.2@33.675,22.14 34.565,21.25 35.435,21.25 LD5_U_Column6.4@36.325,20.36
NetLD4_U_Column7_2: LD4_U_Column7.2 LD5_U_Column7.4 | length 3.4
  Top Layer w0.254: LD5_U_Column7.4@28.175,16.64 29.065,15.75 29.935,15.75 LD4_U_Column7.2@30.825,14.86
NetLD4_U_Column8_2: LD4_U_Column8.2 LD5_U_Column8.4 | length 3.4
  Top Layer w0.254: LD4_U_Column8.2@109.175,49.64 110.065,48.75 110.935,48.75 LD5_U_Column8.4@111.825,47.86
NetLD4_U_Column9_2: LD4_U_Column9.2 LD5_U_Column9.4 | length 3.4
  Top Layer w0.254: LD5_U_Column9.4@103.675,44.14 104.565,43.25 105.435,43.25 LD4_U_Column9.2@106.325,42.36
NetLD4_U_Column10_2: LD4_U_Column10.2 LD5_U_Column10.4 | length 3.4
  Top Layer w0.254: LD4_U_Column10.2@109.175,38.64 110.065,37.75 110.935,37.75 LD5_U_Column10.4@111.825,36.86
NetLD4_U_Column12_2: LD4_U_Column12.2 LD5_U_Column12.4 | length 3.4
  Top Layer w0.254: LD4_U_Column12.2@109.175,27.64 110.065,26.75 110.935,26.75 LD5_U_Column12.4@111.825,25.86
NetLD4_U_Column13_2: LD4_U_Column13.2 LD5_U_Column13.4 | length 3.4
  Top Layer w0.254: LD5_U_Column13.4@103.675,22.14 104.565,21.25 105.435,21.25 LD4_U_Column13.2@106.325,20.36
NetLD4_U_Column14_2: LD4_U_Column14.2 LD5_U_Column14.4 | length 3.4
  Top Layer w0.254: LD4_U_Column14.2@109.175,16.64 110.065,15.75 110.935,15.75 LD5_U_Column14.4@111.825,14.86
NetLD4_U_Column15_2: LD4_U_Column15.2 LD5_U_Column15.4 | length 3.4
  Top Layer w0.254: LD5_U_Column15.4@103.675,33.14 104.565,32.25 105.435,32.25 LD4_U_Column15.2@106.325,31.36
NetLD5_U_Column1_2: LD5_U_Column1.2 LD6_U_Column1.4 | length 3.4
  Top Layer w0.254: LD6_U_Column1.4@22.675,49.64 23.565,48.75 24.435,48.75 LD5_U_Column1.2@25.325,47.86
NetLD5_U_Column2_2: LD5_U_Column2.2 LD6_U_Column2.4 | length 3.4
  Top Layer w0.254: LD5_U_Column2.2@39.175,44.14 40.065,43.25 40.935,43.25 LD6_U_Column2.4@41.825,42.36
NetLD5_U_Column3_2: LD5_U_Column3.2 LD6_U_Column3.4 | length 3.4
  Top Layer w0.254: LD6_U_Column3.4@22.675,38.64 23.565,37.75 24.435,37.75 LD5_U_Column3.2@25.325,36.86
NetLD5_U_Column4_2: LD5_U_Column4.2 LD6_U_Column4.4 | length 3.4
  Top Layer w0.254: LD5_U_Column4.2@39.175,33.14 40.065,32.25 40.935,32.25 LD6_U_Column4.4@41.825,31.36
NetLD5_U_Column5_2: LD5_U_Column5.2 LD6_U_Column5.4 | length 3.4
  Top Layer w0.254: LD6_U_Column5.4@22.675,27.64 23.565,26.75 24.435,26.75 LD5_U_Column5.2@25.325,25.86
NetLD5_U_Column6_2: LD5_U_Column6.2 LD6_U_Column6.4 | length 3.4
  Top Layer w0.254: LD5_U_Column6.2@39.175,22.14 40.065,21.25 40.935,21.25 LD6_U_Column6.4@41.825,20.36
NetLD5_U_Column7_2: LD5_U_Column7.2 LD6_U_Column7.4 | length 3.4
  Top Layer w0.254: LD6_U_Column7.4@22.675,16.64 23.565,15.75 24.435,15.75 LD5_U_Column7.2@25.325,14.86
NetLD5_U_Column8_2: LD5_U_Column8.2 LD6_U_Column8.4 | length 3.4
  Top Layer w0.254: LD5_U_Column8.2@114.675,49.64 115.565,48.75 116.435,48.75 LD6_U_Column8.4@117.325,47.86
NetLD5_U_Column9_2: LD5_U_Column9.2 LD6_U_Column9.4 | length 3.4
  Top Layer w0.254: LD6_U_Column9.4@98.175,44.14 99.065,43.25 99.935,43.25 LD5_U_Column9.2@100.825,42.36
NetLD5_U_Column10_2: LD5_U_Column10.2 LD6_U_Column10.4 | length 3.4
  Top Layer w0.254: LD5_U_Column10.2@114.675,38.64 115.565,37.75 116.435,37.75 LD6_U_Column10.4@117.325,36.86
NetLD5_U_Column12_2: LD5_U_Column12.2 LD6_U_Column12.4 | length 3.4
  Top Layer w0.254: LD5_U_Column12.2@114.675,27.64 115.565,26.75 116.435,26.75 LD6_U_Column12.4@117.325,25.86
NetLD5_U_Column13_2: LD5_U_Column13.2 LD6_U_Column13.4 | length 3.4
  Top Layer w0.254: LD6_U_Column13.4@98.175,22.14 99.065,21.25 99.935,21.25 LD5_U_Column13.2@100.825,20.36
NetLD5_U_Column14_2: LD5_U_Column14.2 LD6_U_Column14.4 | length 3.4
  Top Layer w0.254: LD5_U_Column14.2@114.675,16.64 115.565,15.75 116.435,15.75 LD6_U_Column14.4@117.325,14.86
NetLD5_U_Column15_2: LD5_U_Column15.2 LD6_U_Column15.4 | length 3.4
  Top Layer w0.254: LD6_U_Column15.4@98.175,33.14 99.065,32.25 99.935,32.25 LD5_U_Column15.2@100.825,31.36
NetLD6_U_Column1_2: LD6_U_Column1.2 LD7_U_Column1.4 | length 3.4
  Top Layer w0.254: LD7_U_Column1.4@17.175,49.64 18.065,48.75 18.935,48.75 LD6_U_Column1.2@19.825,47.86
NetLD6_U_Column2_2: LD6_U_Column2.2 LD7_U_Column2.4 | length 3.4
  Top Layer w0.254: LD6_U_Column2.2@44.675,44.14 45.565,43.25 46.435,43.25 LD7_U_Column2.4@47.325,42.36
NetLD6_U_Column3_2: LD6_U_Column3.2 LD7_U_Column3.4 | length 3.4
  Top Layer w0.254: LD7_U_Column3.4@17.175,38.64 18.065,37.75 18.935,37.75 LD6_U_Column3.2@19.825,36.86
NetLD6_U_Column4_2: LD6_U_Column4.2 LD7_U_Column4.4 | length 3.4
  Top Layer w0.254: LD6_U_Column4.2@44.675,33.14 45.565,32.25 46.435,32.25 LD7_U_Column4.4@47.325,31.36
NetLD6_U_Column5_2: LD6_U_Column5.2 LD7_U_Column5.4 | length 3.4
  Top Layer w0.254: LD7_U_Column5.4@17.175,27.64 18.065,26.75 18.935,26.75 LD6_U_Column5.2@19.825,25.86
NetLD6_U_Column6_2: LD6_U_Column6.2 LD7_U_Column6.4 | length 3.4
  Top Layer w0.254: LD6_U_Column6.2@44.675,22.14 45.565,21.25 46.435,21.25 LD7_U_Column6.4@47.325,20.36
NetLD6_U_Column7_2: LD6_U_Column7.2 LD7_U_Column7.4 | length 3.4
  Top Layer w0.254: LD7_U_Column7.4@17.175,16.64 18.065,15.75 18.935,15.75 LD6_U_Column7.2@19.825,14.86
NetLD6_U_Column8_2: LD6_U_Column8.2 LD7_U_Column8.4 | length 3.4
  Top Layer w0.254: LD6_U_Column8.2@120.175,49.64 121.065,48.75 121.935,48.75 LD7_U_Column8.4@122.825,47.86
NetLD6_U_Column9_2: LD6_U_Column9.2 LD7_U_Column9.4 | length 3.4
  Top Layer w0.254: LD7_U_Column9.4@92.675,44.14 93.565,43.25 94.435,43.25 LD6_U_Column9.2@95.325,42.36
NetLD6_U_Column10_2: LD6_U_Column10.2 LD7_U_Column10.4 | length 3.4
  Top Layer w0.254: LD6_U_Column10.2@120.175,38.64 121.065,37.75 121.935,37.75 LD7_U_Column10.4@122.825,36.86
NetLD6_U_Column12_2: LD6_U_Column12.2 LD7_U_Column12.4 | length 3.4
  Top Layer w0.254: LD6_U_Column12.2@120.175,27.64 121.065,26.75 121.935,26.75 LD7_U_Column12.4@122.825,25.86
NetLD6_U_Column13_2: LD6_U_Column13.2 LD7_U_Column13.4 | length 3.4
  Top Layer w0.254: LD7_U_Column13.4@92.675,22.14 93.565,21.25 94.435,21.25 LD6_U_Column13.2@95.325,20.36
NetLD6_U_Column14_2: LD6_U_Column14.2 LD7_U_Column14.4 | length 3.4
  Top Layer w0.254: LD6_U_Column14.2@120.175,16.64 121.065,15.75 121.935,15.75 LD7_U_Column14.4@122.825,14.86
NetLD6_U_Column15_2: LD6_U_Column15.2 LD7_U_Column15.4 | length 3.4
  Top Layer w0.254: LD7_U_Column15.4@92.675,33.14 93.565,32.25 94.435,32.25 LD6_U_Column15.2@95.325,31.36
NetLD7_U_Column7_2: LD7_U_Column7.2
NetLD7_U_Column14_2: LD7_U_Column14.2
NetRF_3: RF.3 U1.11 | length 76.6
  Top Layer w0.254: v1(53.797,44.78) 54.011,44.78 57.742,41.049 57.742,39.704 60.594,36.852 71.44,36.852 73.601,39.013 73.601,39.692 U1.11@72.227,41.066
  Bottom Layer w0.254: RF.3@8.96,43.834 10.225,45.099 10.225,46.95 10.9,47.625 12.775,47.625 13.4,48.25 49.5,48.25 52.97,44.78 v1(53.797,44.78)
NetRF_4: RF.4 U1.12 | length 69.3
  Top Layer w0.254: v1(54,41.75) 54.119,41.631 v1(54.119,39) ; v1(71.475,42.673) 71.751,42.673 U1.12@72.793,41.631
  Bottom Layer w0.254: RF.4@11.5,43.834 11.5,44.085 12.682,44.085 15.301,46.704 48.296,46.704 53.292,41.708 53.958,41.708 v1(54,41.75) ; v1(54.119,39) 55.323,39 58.373,42.05 70.852,42.05 v1(71.475,42.673)
NetRF_5: RF.5 U1.17 | length 75.2
  Top Layer w0.254: v1(57.4,46.075) 62.275,46.075 v1(62.85,45.5) v1@62.85,45.55 ; v1(73.77,44.615) 73.77,44.8 U1.17@75.056,46.086
  Bottom Layer w0.254: RF.5@8.96,46.374 8.96,46.785 10.225,48.05 10.225,50.4 12.706,52.881 50.594,52.881 v1(57.4,46.075) ; v1(62.85,45.5) 64.426,43.924 70.096,43.924 70.787,44.615 v1(73.77,44.615)
NetRF_6: RF.6 U1.15 | length 74.7
  Top Layer w0.254: v1(54,43.75) 54.041,43.75 57.234,40.557 57.234,39.493 60.384,36.344 71.65,36.344 75.117,39.81 75.117,42.702 U1.15@74.49,43.328
  Bottom Layer w0.254: RF.6@11.5,46.374 12.31,46.374 13.678,47.742 49.008,47.742 53,43.75 v1(54,43.75)
NetRF_7: RF.7 U1.16 | length 80.1
  Top Layer w0.254: RF.7@8.96,48.914 10.224,47.65 12.5,47.65 13.25,46.9 v1(13.25,46.25) ; v1(53.721,42.748) 54.056,42.748 54.082,42.723 54.133,42.774 54.158,42.748 54.16,42.75 56.66,40.25 56.66,39.349 60.173,35.836 71.891,35.836 75.75,39.694 75.75,43.2 U1.16@75.056,43.894
  Bottom Layer w0.254: v1(13.25,46.25) 14.212,47.212 48.819,47.212 53.283,42.748 53.309,42.774 53.359,42.723 53.385,42.748 v1(53.721,42.748)
NetU1_7: U1.7 X1.OSCO | length 5.6
  Top Layer w0.254: X1.OSCO@63,39.835 63.068,39.903 67.742,39.903 U1.7@68.338,40.5
NetU1_8: U1.8 X1.OSCI | length 6.6
  Top Layer w0.254: X1.OSCI@63.153,37.988 66.958,37.988 U1.8@68.904,39.934
RST: C2.2 C6.1 pad.2 R1.1 U1.29 | length 15.4
  Top Layer w0.254: C6.1@56.5,47.85 59.74,47.85 59.75,47.86 60.56,47.05 v1(62.5,47.05) ; R1.1@64.1,50.3 64.875,50.3 65.449,49.726 ; pad.2@66.04,50.8 66.04,50.316 65.449,49.726 ; U1.29@66.641,47.783 v1(65.449,48.975) 65.449,49.726
  Bottom Layer w0.254: v1(62.5,47.05) 64.425,48.975 v1(65.449,48.975)
SIGNAL: 8.1 J2.3 P2.2@78.166,28.05 SW1.1 SW3.0 SW4.4 SW5.3 SW5.4 | length 49.9
  Top Layer w1: SW4.4@60.676,17.95 60.676,16.33 61.656,15.35 65.466,15.35 ; SW1.1@65.176,11.54 65.176,15.06 65.466,15.35 ; SW3.0@65.176,31.86 68.296,28.74 SW5.3@68.296,25.45 SW5.4@68.296,17.95 68.296,16.965 66.681,15.35 65.466,15.35 ; 68.804,23.504 75.117,23.504 75.916,24.303 75.916,27.07 76.896,28.05 P2.2@78.166,28.05
  Bottom Layer w1: 8.1@75.7,28.328 75.97,28.058 79.383,28.058 79.891,27.55 J2.3@79.891,25.417
UART_RX: P1.4 U1.30 | length 11.2
  Top Layer w0.254: P1.4@58.63,53.75 58.63,53.13 61,50.76 61,49.545 61.57,48.975 64.318,48.975 U1.30@66.076,47.217
UART_TX: P1.5 U1.31 | length 13.2
  Top Layer w0.254: P1.5@56.09,53.75 56.09,53.435 57.55,51.975 59,51.975 60.492,50.483 60.492,49.335 61.36,48.467 63.695,48.467 U1.31@65.51,46.652
pads on no net: J2.4 RF.8 SW4.1 SW4.3 SW5.1 U1.19 U1.22 U1.26 U1.27 U1.28
copper on no net:
  other v2: 73.77,21.708 80.78,21.708 116.49,46 123.5,46

## Polygon pours and split planes (outlines as drawn)
GND on Bottom Layer "GND_L02_P015" (solid, pour order 15): 11.27,10 53.73,10 ccw(c53.73,11.27) 55,11.27 55,19.5 cw(c55.75,19.5) 55.75,20.25 cw(c55.75,19.5) 56.5,19.5 56.5,11.25 ccw(c57.75,11.25) 57.75,10 82.25,10 ccw(c82.25,11.25) 83.5,11.25 83.5,19.5 cw(c84.25,19.5) 84.25,20.25 cw(c84.25,19.5) 85,19.5 85,11.27 ccw(c86.27,11.27) 86.27,10 128.73,10 ccw(c128.73,11.27) 130,11.27 130,53.73 ccw(c128.73,53.73) 128.73,55 8.25,55 ccw(c8.25,53.75) 7,53.75 7,40.5 10,37.5 10,11.27 ccw(c11.27,11.27)
GND on Top Layer "GND_L01_P014" (solid, pour order 14): 11.27,10 53.73,10 ccw(c53.73,11.27) 55,11.27 55,19.5 cw(c55.75,19.5) 55.75,20.25 cw(c55.75,19.5) 56.5,19.5 56.5,11.25 ccw(c57.75,11.25) 57.75,10 82.25,10 ccw(c82.25,11.25) 83.5,11.25 83.5,19.5 cw(c84.25,19.5) 84.25,20.25 cw(c84.25,19.5) 85,19.5 85,11.27 ccw(c86.27,11.27) 86.27,10 128.73,10 ccw(c128.73,11.27) 130,11.27 130,53.73 ccw(c128.73,53.73) 128.73,55 8.25,55 ccw(c8.25,53.75) 7,53.75 7,40.5 10,37.5 10,11.27 ccw(c11.27,11.27)

## Keep-outs
Keep-Out Layer:
  the board outline again, w0.2

## Silkscreen, mask and mechanical layers (free items; w line width, h text height)
Top Overlay:
  lines w0.2: 15.25,15.75 16.25,15.75 ; 15.25,48.75 16.25,48.75 ; 15.75,15.25 15.75,16.25 ; 15.75,48.25 15.75,49.25 ; 31.75,32.25 32.75,32.25 ; 32.25,31.75 32.25,32.75 ; 48.25,15.75 49.25,15.75 ; 48.25,48.75 49.25,48.75 ; 48.75,15.25 48.75,16.25 ; 48.75,48.25 48.75,49.25 ; 55.63,51.84 55.88,52.09 ; 55.88,51.09 55.88,52.09 ; 56.13,51.84 55.88,52.09 ; 58.17,51.34 58.42,51.09 ; 58.42,52.09 58.42,51.09 ; 58.67,51.34 58.42,51.09 ; 90.25,48.75 91.25,48.75 ; 90.75,15.75 91.75,15.75 ; 90.75,48.25 90.75,49.25 ; 91.25,15.25 91.25,16.25 ; 123.25,48.75 124.25,48.75 ; 123.75,15.75 124.75,15.75 ; 123.75,48.25 123.75,49.25 ; 124.25,15.25 124.25,16.25
  text "GND" at 67.488,53.061 h0.7
  text "DTR" at 52.417,51.472 h0.7
  text "5V" at 60.29,51.34 h0.7
Bottom Overlay:
  text "A2" at 84.303,50.8 h0.8
  text "A1" at 86.598,50.8 h0.8
  text "D4" at 89.426,50.8 h0.8
  text "D3" at 91.988,50.8 h0.8
  text "D2" at 94.55,50.8 h0.8
  text "3V" at 97.111,50.8 h0.8
  text "GND" at 100.051,50.8 h0.8
  text "5V" at 102.235,50.8 h0.8
Drill Guide:
  lines w0.2: 55,11.25 55,14 55,19.5 cw(c55.75,19.5) 55.75,20.25 cw(c55.75,19.5) 56.5,19.5 56.5,11.25 ccw(c57.75,11.25) 57.75,10 82.25,10 ccw(c82.25,11.25) 83.5,11.25 83.5,19.5 cw(c84.25,19.5) 84.25,20.25 cw(c84.25,19.5) 85,19.5 85,14 85,11.25 ; 55,11.27 cw(c53.73,11.27) 53.73,10 11.27,10 cw(c11.27,11.27) 10,11.27 10,37.5 7,40.5 7,53.75 cw(c8.25,53.75) 8.25,55 123.75,55 128.73,55 cw(c128.73,53.73) 130,53.73 130,11.27 cw(c128.73,11.27) 128.73,10 86.27,10 cw(c86.27,11.27) 85,11.27

## Text inside footprints (layer, text, board x,y; h text height)
RF: Bottom Overlay "2" at 10.211,39.116 h0.7 r270; Bottom Overlay "1" at 9.017,39.294 h0.7 r270; Bottom Overlay "7" at 8.66,50.594 h0.7 r270; Bottom Overlay "8" at 11.16,50.594 h0.7 r270